# Altium PCB ESP32-Core.PcbDoc
Units mil, origin at the board's own origin, x right, y up, seen from the top; angles counter-clockwise.
Board outline 1180 x 1165 mil, 2 copper layers (Top Layer, Bottom Layer); 11 components, 31 nets, 122 pads, 217 vias.
Unrouted connection lines stored in the file: 29.
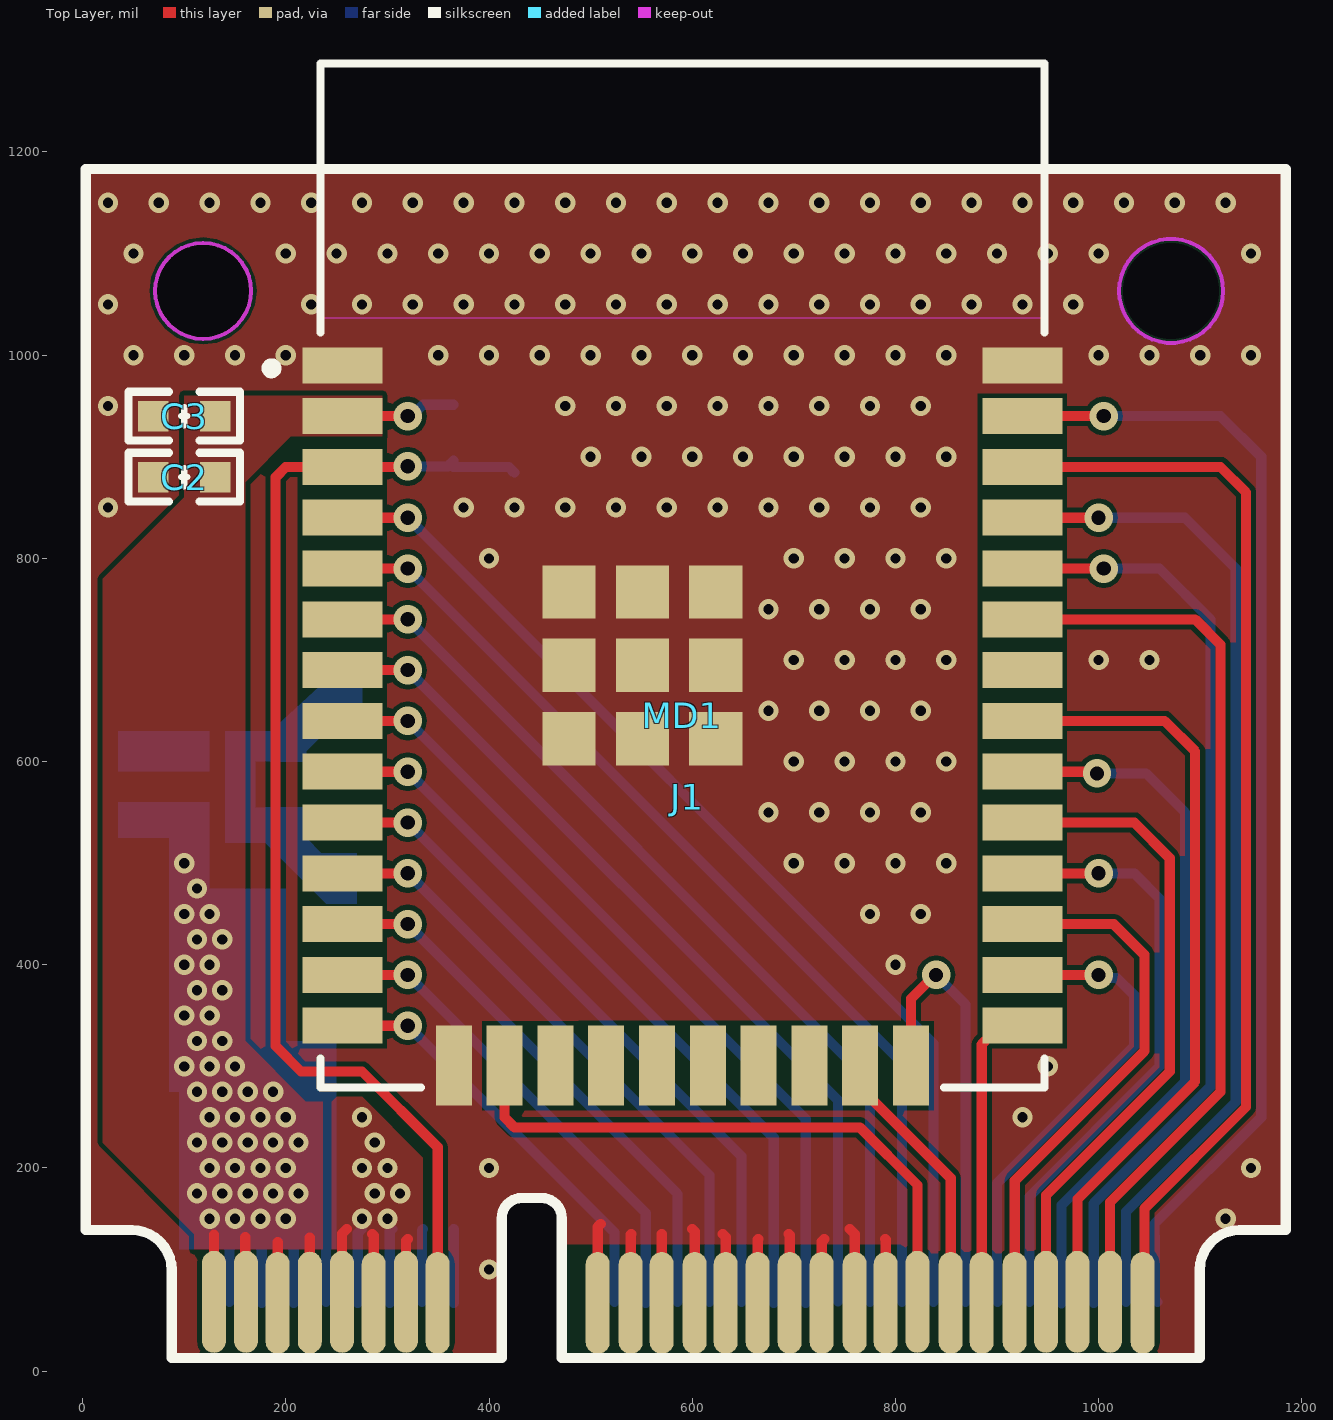
[diagram p0: Top Layer view]
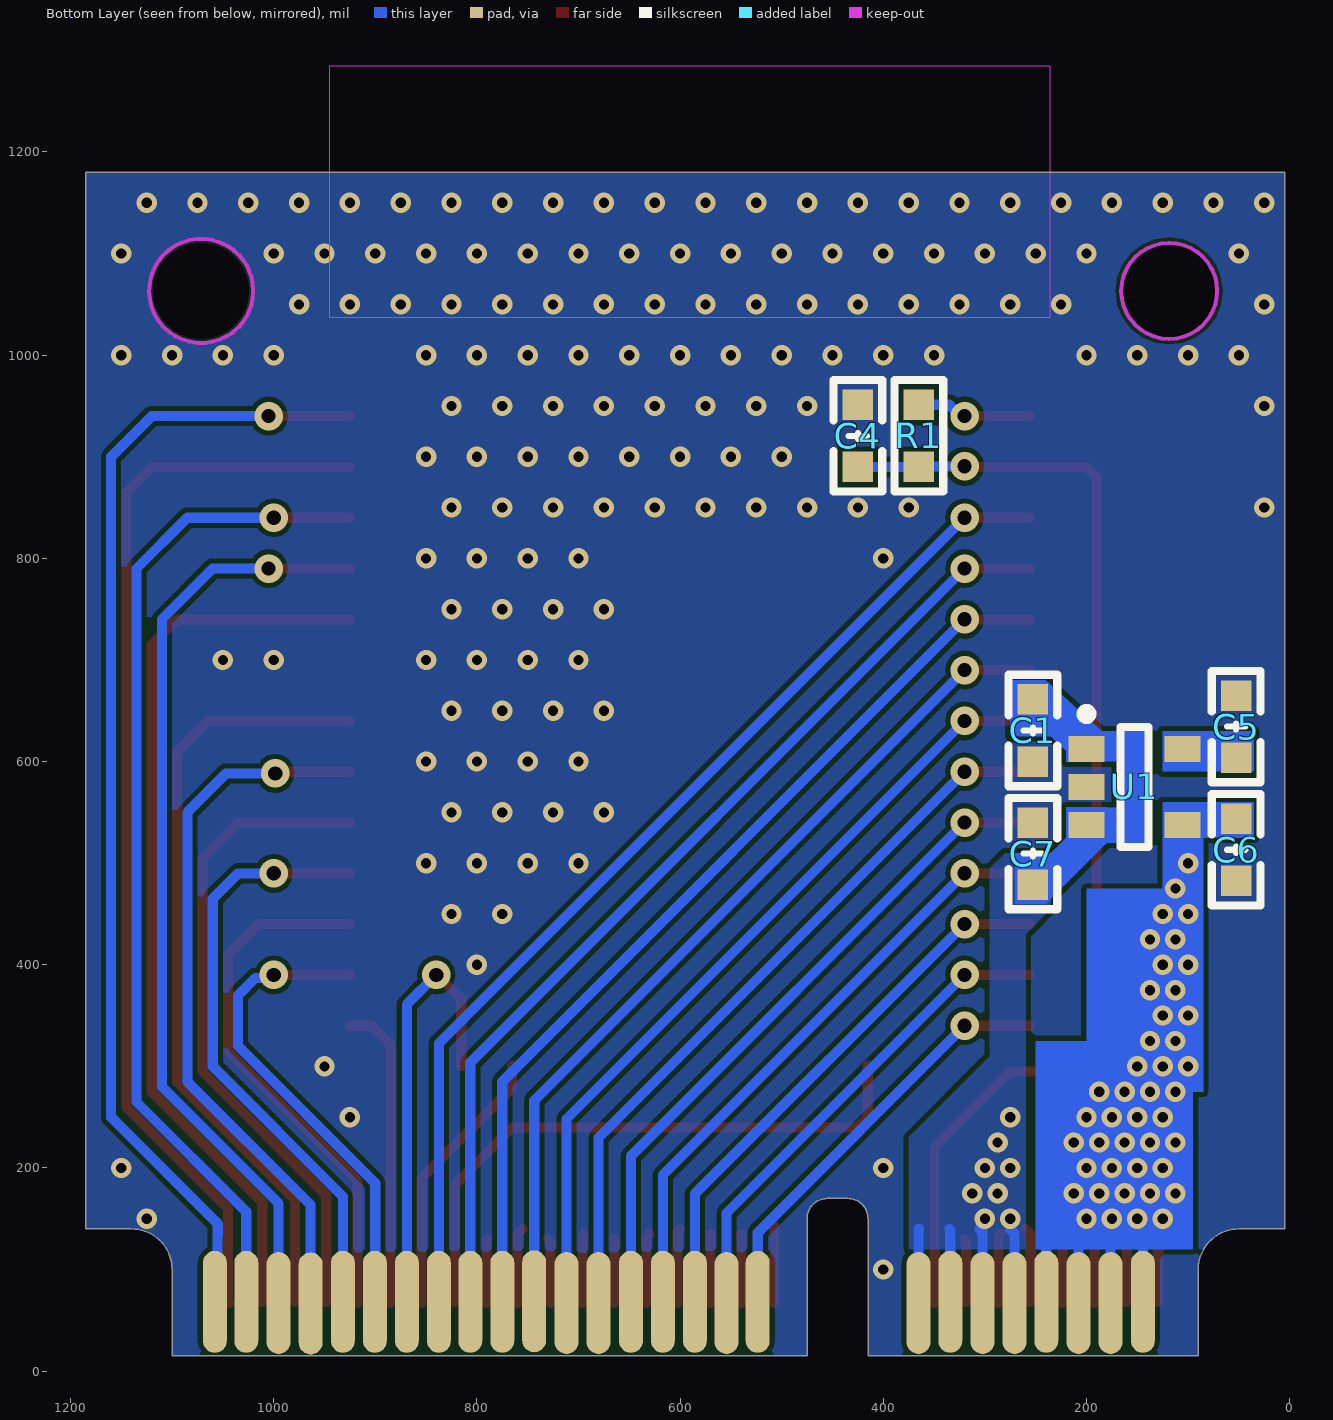
[diagram p1: Bottom Layer view, seen from below]
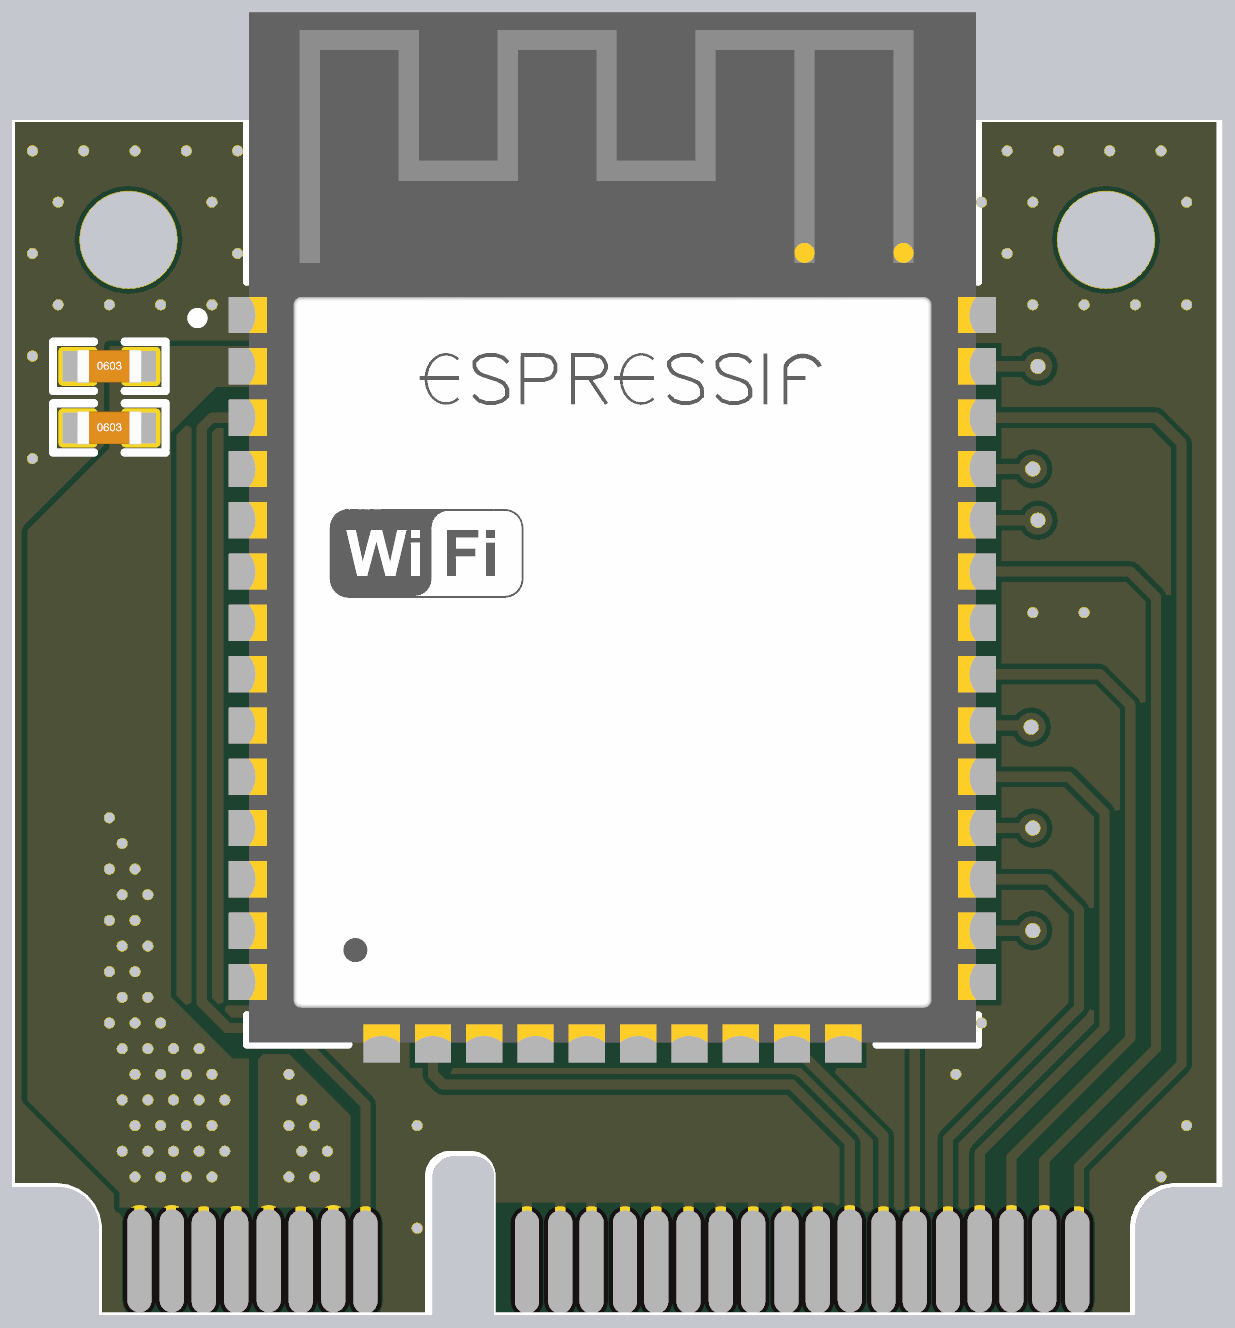
[diagram p2: 3D render of the assembled board from above, using the file's embedded part models]
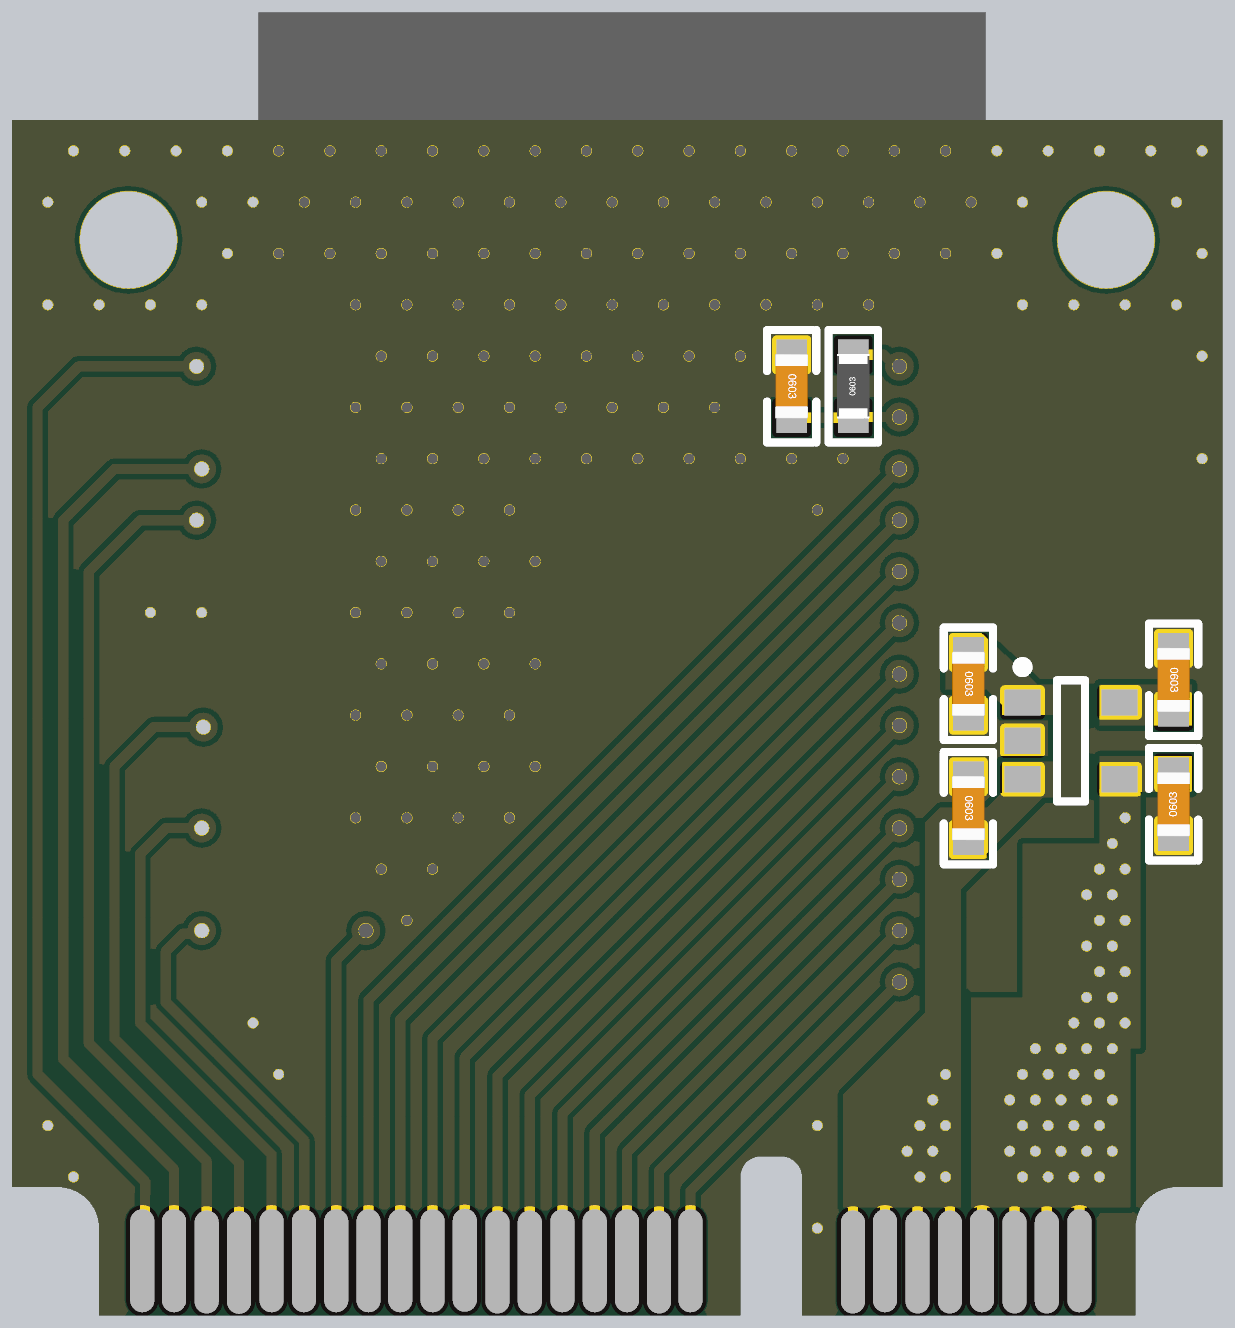
[diagram p3: 3D render of the assembled board from below, using the file's embedded part models]

## Layer stack, top to bottom
Top Solder: solder mask 0.4, Solder Resist, Dk 3.5
Top Layer: signal copper 1.4
Dielectric 1: dielectric 12.6, FR-4, Dk 4.8
Bottom Layer: signal copper 1.4
Bottom Solder: solder mask 0.4, Solder Resist, Dk 3.5

## Board outline
90,15 90,100 ccw(c50,100) 50,140 5,140 5,1180 1185,1180 1185,140 1140,140 ccw(c1140,100) 1100,100 1100,15 475,15 475,150 ccw(c455,150) 455,170 435,170 ccw(c435,150) 415,150 415,15

## Design rules (kind name [scope] priority, off if disabled: settings)
Clearance [All] p1: gap=5 ignorepadtopadclearanceinfootprint=FALSE except(0: Arc-Hole Track-Hole SMDPad-Hole THPad-Hole Via-Hole Fill-Hole Poly-Hole Region-Hole Text-Hole)
ComponentClearance [All] p1: gap=0 collisioncheckmode=3 verticalgap=0 showdistances=FALSE
PolygonConnect [All] p1: connectstyle=Direct reliefconductorwidth=10 reliefentries=4 polygonreliefangle="90 Angle" airgapwidth=10
RoutingVias [All] p1: holewidth=28 width=50 viastyle="Through Hole" minholewidth=14 minwidth=28 maxholewidth=28 maxwidth=50
SolderMaskExpansion [All] p1: expansion=4 istentingtop=FALSE
Width [All] p1: maxlimit=10 minlimit=10 preferedwidth=10
29 further rules are at their usual default settings.

## Components (designator, comment, footprint, x,y, rotation, side; value= is the part's Value field where it differs from the comment)
C1 "104" "C 0603_L" 252.76,630.59 r270 bottom
C2 "104" "C 0603_L" 100,880 r0 top
C3 "104" "C 0603_L" 100,940 r0 top
C4 "1uF" "C 0603_L" 425,920.59 r270 bottom
C5 "104" "C 0603_L" 52.76,634.41 r270 bottom
C6 "104" "C 0603_L" 52.76,513.23 r90 bottom
C7 "104" "C 0603_L" 252.76,509.41 r270 bottom
J1 "MM60-52B1-E1-R650" MINI_PCIE_GOLD_3130 595,565 r0 top locked
MD1 "ESP32-WROOM-32D" FP-ESP32-WROOM-32E 590.35,782.91 r0 top locked
R1 "10K" "R 0603_L" 365,920.59 r90 bottom
U1 "LP2992AIM5-3.3/NOPB" MF05A_L 152.76,575 r180 bottom

## Footprints (in the part's own frame and the unit in brackets; to place one, negate y for a bottom-side part, rotate by r counter-clockwise, add the part's x,y. Pads: shape width x height; smd on the part's side, far side on the other; paste and mask are expansions set on the pad)
"C 0603_L" [mil] "无极性贴片电容"
  rect 30x30 smd: 1(-30.59,0) 2(30.59,0)
  silkscreen extent -55,-24 55,24, body extent -31,-16 31,16, height 32
FP-ESP32-WROOM-32E [mm]
  rect 2x0.9 smd paste+0 mask+0: 1(-8.5,5.26) 2(-8.5,3.99) 3(-8.5,2.72) 4(-8.5,1.45) 5(-8.5,0.18) 6(-8.5,-1.09) 7(-8.5,-2.36) 8(-8.5,-3.63) 9(-8.5,-4.9) 10(-8.5,-6.17) 11(-8.5,-7.44) 12(-8.5,-8.71) 13(-8.5,-9.98) 14(-8.5,-11.25) 25(8.5,-11.25) 26(8.5,-9.98) 27(8.5,-8.71) 28(8.5,-7.44) 29(8.5,-6.17) 30(8.5,-4.9) 31(8.5,-3.63) 32(8.5,-2.36) 33(8.5,-1.09) 34(8.5,0.18) 35(8.5,1.45) 36(8.5,2.72) 37(8.5,3.99) 38(8.5,5.26)
  rect 0.9x2 smd paste+0 mask+0: 15(-5.715,-12.25) 16(-4.445,-12.25) 17(-3.175,-12.25) 18(-1.905,-12.25) 19(-0.635,-12.25) 20(0.635,-12.25) 21(1.905,-12.25) 22(3.175,-12.25) 23(4.445,-12.25) 24(5.715,-12.25)
  rect 1.33x1.33 smd paste+0 mask+0: 39(-2.835,-4.075) 39(-2.835,-2.24) 39(-2.835,-0.405) 39(-1,-4.075) 39(-1,-2.24) 39(-1,-0.405) 39(0.835,-4.075) 39(0.835,-2.24) 39(0.835,-0.405)
  Keep-Out Layer region: -9,6.45 9,6.45 9,12.75 -9,12.75
  Keep-Out Layer region: -9,6.45 9,6.45 9,12.75 -9,12.75
  silkscreen extent -10.4,-12.8 9.05,12.8, body extent -9.6,-13.35 9.6,12.9, height 0.25
MF05A_L [mm] "SOT23, 5-Leads, Body 2.9x1.6mm, Pitch 0.95mm, Lead Span 2.8mm, IPC High Density"
  rect 0.9x0.65 smd: 1(-1.2,0.95) 2(-1.2,0) 3(-1.2,-0.95) 4(1.2,-0.95) 5(1.2,0.95)
  silkscreen extent -1.33,-1.5 0.35,1.95, body extent -0.83,-1.49 0.83,1.5, height 1.19
MINI_PCIE_GOLD_3130 [mm]
  round 0 hole 2.4: 0(-12.1,12.655) 0(12.1,12.655)
  oval 0.6x2.55 smd: 1(-11.828,-12.618) 3(-11.028,-12.618) 5(-10.235,-12.647) 7(-9.433,-12.638) 9(-8.628,-12.618) 11(-7.835,-12.647) 13(-7.028,-12.618) 15(-6.235,-12.647) 17(-2.235,-12.647) 19(-1.41,-12.647) 21(-0.635,-12.647) 23(0.19,-12.647) 25(0.965,-12.647) 27(1.765,-12.647) 29(2.565,-12.647) 31(3.365,-12.647) 33(4.19,-12.647) 35(4.965,-12.647) 37(5.758,-12.618) 39(6.59,-12.647) 41(7.365,-12.647) 43(8.19,-12.647) 45(8.972,-12.618) 47(9.758,-12.618) 49(10.572,-12.618) 51(11.39,-12.647)
  oval 0.6x2.55 smd far side: 2(-11.442,-12.618) 4(-10.635,-12.647) 6(-9.835,-12.647) 8(-9.028,-12.618) 10(-8.235,-12.647) 12(-7.435,-12.647) 14(-6.628,-12.618) 16(-5.835,-12.647) 18(-1.813,-12.618) 20(-1.035,-12.647) 22(-0.242,-12.618) 24(0.558,-12.618) 26(1.358,-12.618) 28(2.165,-12.647) 30(2.965,-12.647) 32(3.775,-12.604) 34(4.572,-12.618) 36(5.372,-12.618) 38(6.158,-12.618) 40(6.958,-12.618) 42(7.758,-12.618) 44(8.558,-12.618) 46(9.363,-12.655) 48(10.165,-12.647) 50(10.972,-12.618) 52(11.758,-12.618)
  Keep-Out Layer circle w0.1: c12.1,12.655 r1.3
  Keep-Out Layer circle w0.1: c-12.1,12.655 r1.2
  silkscreen extent -15.04,-14.02 14.96,15.7
"R 0603_L" [mil] "1/10W贴片电阻"
  rect 30x30 smd: 1(-30.59,0) 2(30.59,0)
  silkscreen extent -55,-24 55,24, body extent -31,-16 31,16, height 16

## Part data
C1 C2 C3 C4 C5 C6 C7: library part C, "无极性贴片电容", BOM名称=无极性贴片电容, 材质=X7R
J1: library part MINI_PCIE_GOLD, "Compatible with PCI Express Mini Card, 5.9 mm Height, -40 to 85 degC, 52-Pin SMD, RoHS, Tape and Reel", Color=-, Manufacturer="JAE Electronics", Operating Temperature=-40°C~85°C, Package Description="52-Pin Surface Mount Device, Body 28.4 x 10 mm, Pitch 0.8 mm", Package Reference=MM60-52B1, Package Version="Rev. 2, 01/2006", Standard Package=1, Associated Product=670-2277-2-ND-CONNMINIEXPRESSCARDLATCHSMD670-2277-1-ND-CONNMINIEXPRESSCARDLATCHSMD670-2277-6-ND-CONNMINIEXPRESSCARDLATCHSMD, Card Thickness="0.039\"(1.00mm)", Card Type=PCIExpressMiniCard, Catalog Drawings=MM60SeriesSideMM60SeriesTop, Category=Connectors,Interconnects, Contact Finish=Gold, Contact Finish Thickness=3.9µin(0.10µm), Contact Material=CopperAlloy, Contact Type=-, Datasheet URL=http://www.jae.com/z-en/pdf_download_exec.cfm?param=MB-0147-6E_MM60.pdf, Datasheet Version=04/2015, Family=CardEdgeConnectors-EdgeboardConnectors, Featured Product=MM60PCIeMiniCardConnector, Features=BoardGuide, Flange Feature=-, Gender=Female, Manufacturer Part Number=MM60-52B1-E1-R650, Manufacturer URL=http://www.jaeusa.com/, Material - Insulation=Thermoplastic, Mounting Technology=SurfaceMount, Mounting Type=SurfaceMount,RightAngle, Number of Positions=52, Number of Positions/Bay/Row=-, Number of Rows=2, Online Catalog=MM60Series, Other Names=670-2275-6, Other Related Documents=CardSelectionGuide, Package URL=https://datasheet.ciiva.com/7633/332207-7633323.pdf, Packaging=Digi-Reel®, Pitch="0.031\"(0.80mm)", Product Training Modules=MM60PCIeMiniCardConnectorMemoryModules,theSM3andMM60SeriesofConnectors, Read Out=Dual, Series=MM60, Termination=Solder
MD1: library part ESP32-WROOM-32E, "WIFI MODULE 32MBITS SPI FLASH", Manufacturer="Espressif Systems", Max Frequency=2484MHz, Max Supply Voltage=3.6V, Min Supply Voltage=3V, Nominal Supply Current=500mA, Temperature="-40°C to +85°C", Temperature Range High=+85°C, Temperature Range Low=-40°C, Automotive=No, Bandwidth=72MHz, Category=UNK, ComponentLink2Description=Datasheet, ComponentLink2URL=https://www.espressif.com/sites/default/files/documentation/esp32-wroom-32d_esp32-wroom-32u_datasheet_en.pdf, Data Rate=150Mbits/s, Device Class L1="Integrated Circuits (ICs)", Device Class L2="RF Semiconductors and Devices", Device Class L3=Transceivers, Digikey Description="WIFI MODULE 32MBITS SPI FLASH", Height=3.2mm, Interface=I2C,SPI,UART,Ethernet,I2S,Other, Lead Free=Yes, Manufacturer Part Number=ESP32-WROOM-32D, Mouser Description="Wi-Fi/BT BLE Module ESP32-D0WD, SPI Flash, UART, P", Number Of Adc Channels=16, Number Of Gpio=32, Octopart=https://octopart.com/esp32-wroom-32d-espressif+systems-91040050, Package=ESP32-WROOM-32D, RoHS=TRUE, Sensitivity=-98dBm
R1: library part R, "贴片电阻", BOM名称=贴片电阻
U1: library part CMP-0062-02136-2, "Micropower 250 mA Low-Noise Ultra Low-Dropout Regulator, 5-pin SOT-23, Pb-Free", Manufacturer="National Semiconductor", PackageTopMarking=LFEA*XTT, PowerWise=N, ComponentLink1Description="LP2992 Datasheet", ComponentLink1URL=http://www.national.com/ds/LP/LP2992.pdf, ComponentLink2Description="LP2992 Web Page", ComponentLink2URL=http://www.national.com/pf/LP/LP2992.html, ComponentLink3Description="MF05A Package Page", ComponentLink3URL=http://www.national.com/packaging/folders/mf05a.html, CompType="LDO IC", DatasheetVersion=May-2005, PackageDescription="Molded SOT-23, .115 x .063 x .040 in Body, 5 Lead, .0375 in Pitch", PackageReference=MF05A, PackageVersion="revD, Aug-2008", PinCount=5, RevisionNote="Component URLs added", RoHS=Y

## Via types
v1: diameter 20, hole 10, Top Layer to Bottom Layer, tented both sides, 197 vias
v2: diameter 28, hole 14, Top Layer to Bottom Layer, tented both sides, 20 vias

## Nets (pads, with @x,y where several pads share a name; then routed paths per layer and width w, separated by ;. In a path a pad name is that pad's centre, name@x,y a point inside that pad or via, vN(x,y) a via of type N, cw(c..) or ccw(c..) an arc to the next point about the centre after c; other vN are vias at no path point)
+3.3: C2.2 C3.2 C6.2 J1.1 J1.2 J1.3 J1.4 J1.5 J1.6 J1.7 J1.8 MD1.2 R1.2 U1.4 | length 693.8
  Top Layer w10: J1.1 J1.1@129.33,74.54 ; 129.33,134.33 J1.1@129.33,74.54 ; J1.1@135.62,68.25 132.47,71.39 J1.1@129.33,74.54 ; 160,131.95 160,69.07 J1.3 ; J1.5 192.05,127.05 ; J1.7 223.62,131.38 ; MD1.2 v2(320,940)
  Bottom Layer w10: J1.2 144.53,134.53 145,135 166.3,135 176.3,125 J1.4 ; J1.6 207.8,132.2 232.36,132.2 239.56,125 J1.8 ; v2(320,940) 323.82,940 335,951.18 R1.2
  other v1: 125,150 150,150 175,150 200,150 112.5,175 137.5,175 162.5,175 187.5,175 212.5,175 125,200 150,200 175,200 200,200 112.5,225 137.5,225 162.5,225 187.5,225 212.5,225 125,250 150,250 175,250 200,250 112.5,275 137.5,275 162.5,275 187.5,275 100,300 125,300 150,300 112.5,325 137.5,325 100,350 125,350 112.5,375 137.5,375 100,400 125,400 112.5,425 137.5,425 100,450 125,450 112.5,475 100,500
+5: C1.1 C7.2 J1.9 J1.10 J1.11 J1.12 J1.13 J1.14 J1.16 U1.1 U1.3 | length 498.6
  Top Layer w10: J1.9 255.31,135.31 260,140 ; 285,135 286.54,133.46 J1.11 ; J1.13 318.3,128.3 320,130
  Bottom Layer w10: J1.10 270.79,135.79 275,140 ; J1.12 302.28,137.28 305,140 ; J1.14 334.05,139.05 335,140 ; 365,140 365.28,139.72 J1.16
  other v1: 275,150 300,150 287.5,175 312.5,175 275,200 300,200 287.5,225 275,250
EN: C4.2 J1.15 MD1.3 R1.1 | length 1161.9
  Top Layer w10: v2@320,890 200,890 190,880 190,320 215,295 275,295 349.53,220.47 J1.15
  Bottom Layer w10: v2(320,890.59) 359.41,890.59 365,896.18 R1.1@362.2,893.39 ; R1.1 419.41,890 C4.2@425,884.41
GND: C1.2 C2.1 C3.1 C4.1 C5.1 C6.1 C7.1 J1.17 J1.19 J1.21 J1.23 J1.25 J1.27 J1.29 J1.31 J1.33 J1.35 MD1.1 MD1.15 MD1.38 MD1.39 U1.2 | length 691.7
  Top Layer w10: J1.17 507.01,142.01 510,145 ; J1.19 539.49,134.49 540,135 ; J1.21 570,135 ; 600,140 602.48,137.52 J1.23 ; 630,135 632.99,132.01 J1.25 ; J1.27 664.49,129.49 665,130 ; 695,135 695.98,134.02 J1.29 ; J1.31 727.48,127.48 730,130 ; 755,140 759.96,135.04 J1.33 ; 790,130 790.47,129.53 J1.35
  other v1: 400,100 1125,150 400,200 1150,200 925,250 950,300 800,400 775,450 825,450 700,500 750,500 800,500 850,500 675,550 725,550 775,550 825,550 700,600 750,600 800,600 850,600 675,650 725,650 775,650 825,650 700,700 750,700 800,700 850,700 1000,700 1050,700 675,750 725,750 775,750 825,750 400,800 700,800 750,800 800,800 850,800 25,850 375,850 425,850 475,850 525,850 575,850 625,850 675,850 725,850 775,850 825,850 500,900 550,900 600,900 650,900 700,900 750,900 800,900 850,900 25,950 475,950 525,950 575,950 625,950 675,950 725,950 775,950 825,950 50,1000 100,1000 150,1000 200,1000 350,1000 400,1000 450,1000 500,1000 550,1000 600,1000 650,1000 700,1000 750,1000 800,1000 850,1000 1000,1000 1050,1000 1100,1000 1150,1000 25,1050 225,1050 275,1050 325,1050 375,1050 425,1050 475,1050 525,1050 575,1050 625,1050 675,1050 725,1050 775,1050 825,1050 875,1050 925,1050 975,1050 50,1100 200,1100 250,1100 300,1100 350,1100 400,1100 450,1100 500,1100 550,1100 600,1100 650,1100 700,1100 750,1100 800,1100 850,1100 900,1100 950,1100 1000,1100 1150,1100 25,1150 75,1150 125,1150 175,1150 225,1150 275,1150 325,1150 375,1150 425,1150 475,1150 525,1150 575,1150 625,1150 675,1150 725,1150 775,1150 825,1150 875,1150 925,1150 975,1150 1025,1150 1075,1150 1125,1150
IO0: J1.41 MD1.25 | length 302.2
  Top Layer w10: J1.41 884.96,321.61 903.35,340 MD1.25
IO2: J1.40 MD1.24 | length 434
  Top Layer w10: MD1.24 815.35,366.56 838.79,390 v2(840,390)
  Bottom Layer w10: v2(840,390) 868.94,361.06 J1.40
IO4: J1.42 MD1.26 | length 476.1
  Top Layer w10: MD1.26 v2(1000,390)
  Bottom Layer w10: J1.42 900,68.68 900,185 1035,320 1035,370 1018.01,386.99 1003.01,386.99 v2(1000,390)
IO5: J1.45 MD1.29 | length 646.7
  Top Layer w10: MD1.29 1035,540 1070,505 1070,295 948.22,173.22 J1.45
IO12: J1.18 MD1.14 | length 420.4
  Top Layer w10: MD1.14 v2(320,340)
  Bottom Layer w10: v2(320,340) 523.62,136.38 J1.18
IO13: J1.37 MD1.16 | length 599.9
  Top Layer w10: MD1.16 415.35,249.65 425,240 765,240 821.7,183.3 J1.37
IO14: J1.20 MD1.13 | length 484.2
  Top Layer w10: MD1.13 v2(320,390)
  Bottom Layer w10: v2(320,390) 554.25,155.75 J1.20
IO15: J1.39 MD1.23 | length 270.4
  Top Layer w10: MD1.23 765.35,278.98 854.45,189.88 J1.39
IO16: J1.43 MD1.27 | length 528.2
  Top Layer w10: J1.43 917.44,187.44 1045,315 1045,410 1015,440 MD1.27
IO17: J1.44 MD1.28 | length 595.2
  Top Layer w10: MD1.28 v2(1000,490)
  Bottom Layer w10: J1.44 931.93,171.93 1060,300 1060,465 1035,490 v2(1000,490)
IO18: J1.46 MD1.30 | length 710.1
  Top Layer w10: MD1.30 996.8,590 v2(998.42,588.38)
  Bottom Layer w10: J1.46 963.62,163.62 1085,285 1085,550 1046.62,588.38 v2(998.42,588.38)
IO19: J1.47 MD1.31 | length 772.2
  Top Layer w10: MD1.31 1065,640 1095,610 1095,285 979.18,169.18 J1.47
IO21: J1.49 MD1.33 | length 897.2
  Top Layer w10: MD1.33 1095,740 1120,715 1120,275 1011.22,166.22 J1.49
IO22: J1.51 MD1.36 | length 1070.3
  Top Layer w10: MD1.36 1120,890 1145,865 1145,260 1045,160 1045,68.66 J1.51
IO23: J1.52 MD1.37 | length 1128
  Top Layer w10: MD1.37 v2(1005,940)
  Bottom Layer w10: v2(1005,940) 1120,940 1160,900 1160,250 1055,145 1055,133.23 1055.31,132.92 1055.31,70.85 J1.52
IO25: J1.26 MD1.10 | length 672.1
  Top Layer w10: MD1.10 v2(320,540)
  Bottom Layer w10: v2(320,540) 648.47,211.53 J1.26
IO26: J1.24 MD1.11 | length 609.1
  Top Layer w10: MD1.11 v2(320,490)
  Bottom Layer w10: v2(320,490) 616.97,193.03 J1.24
IO27: J1.22 MD1.12 | length 546
  Top Layer w10: MD1.12 v2(320,440)
  Bottom Layer w10: v2(320,440) 585.48,174.52 J1.22
IO32: J1.30 MD1.8 | length 799.5
  Top Layer w10: MD1.8 v2(320,640)
  Bottom Layer w10: v2(320,640) 711.74,248.26 J1.30
IO33: J1.28 MD1.9 | length 736.4
  Top Layer w10: MD1.9 v2(320,590)
  Bottom Layer w10: v2(320,590) 680.24,229.76 J1.28
IO34: J1.34 MD1.6 | length 924.5
  Top Layer w10: MD1.6 v2(320,740)
  Bottom Layer w10: v2(320,740) 775,285 J1.34
IO35: J1.32 MD1.7 | length 861
  Top Layer w10: MD1.7 v2(320,690)
  Bottom Layer w10: v2(320,690) 743.62,266.38 J1.32
NetC5_2: C5.2 U1.5
RXD0: J1.50 MD1.35 | length 997.2
  Top Layer w10: MD1.35 v2(1000,840)
  Bottom Layer w10: v2(1000,840) 1085,840 1135,790 1135,265 1026.96,156.96 J1.50
SENSOR_VN: J1.36 MD1.5 | length 987.6
  Top Layer w10: MD1.5 v2(320,790)
  Bottom Layer w10: v2(320,790) 806.49,303.51 J1.36
SENSOR_VP: J1.38 MD1.4 | length 1050.4
  Top Layer w10: MD1.4 v2(320,840)
  Bottom Layer w10: v2(320,840) 837.44,322.56 J1.38
TXD0: J1.48 MD1.34 | length 926.2
  Top Layer w10: MD1.34 v2(1005,790)
  Bottom Layer w10: J1.48 995.2,165.2 1110,280 1110,740 1060,790 v2(1005,790)
pads on no net: J1.0 MD1.17 MD1.18 MD1.19 MD1.20 MD1.21 MD1.22 MD1.32

## Polygon pours and split planes (outlines as drawn)
+5 on Bottom Layer "+5_L02_P001" (solid, pour order 1): 260,120 260,430 235,455 235,510 280,510 295,495 295,310 375,230 375,120
GND on Bottom Layer "GND_L02_P004" (solid, pour order 4): 90,15 90,100 ccw(c50,100) 50,140 5,140 5,1180 1185,1180 1185,140 1140,140 ccw(c1140,100) 1100,100 1100,15 475,15 475,150 ccw(c455,150) 455,170 435,170 ccw(c435,150) 415,150 415,15
GND on Top Layer "GND_L01_P003" (solid, pour order 3): 90,15 90,100 ccw(c50,100) 50,140 5,140 5,1180 1185,1180 1185,140 1140,140 ccw(c1140,100) 1100,100 1100,15 475,15 475,150 ccw(c455,150) 455,170 435,170 ccw(c435,150) 415,150 415,15
+5 on Top Layer "+5_L01_P002" (solid, remove dead copper, pour order 2): 245,120 335,120 335,210 275,270 250,270 245,265
+3.3 on Top Layer "+3.3_L01_P000" (solid, pour order 0): 236.26,120 236.26,265.19 219.81,265.19 160,325 160,875 205,920 295,920 295,960 100,960 100,860 20,780 20,225 110,135 110,120

## Other copper
Top Layer:
  pour cut-out: 475,125 805,125 805,15.39 805.39,15 475,15
Bottom Layer:
  rectangle net +3.3: 95,120 250,325
  rectangle net +3.3: 85,275 200,385
  rectangle net +3.3: 90,385 200,475
  rectangle net +3.3: 85,385 125,525
  rectangle net +5: 155,520 180,555
  rectangle net +5: 140,520 170,630
  rectangle net +5: 140,600 185,630
  rectangle net +3.3: 35,525 125,560
  rectangle net NetC5_2: 35,590 125,630
  region net +5: 240,460 180,520 180,555 220,555 220,525 235,510 270,510 270,460
  region net +5: 240,680 185,630 185,600 220,600 220,610 235,625 275,625 275,680